# Altium PCB 175-00017_rev1, Two Axis Stepper Driver Apps Board.PcbDoc
Units mm, origin at the board's own origin, x right, y up, seen from the top; angles counter-clockwise.
Board outline 35 x 80 mm, 6 copper layers (Top (*.GTL), GND1 (*.GP1), Mid-Layer 1 (*.G1), +48V (*.GP2), GND2(*.GP3), Bottom Layer (*.GBL)); 21 components, 44 nets, 200 pads, 77 vias.
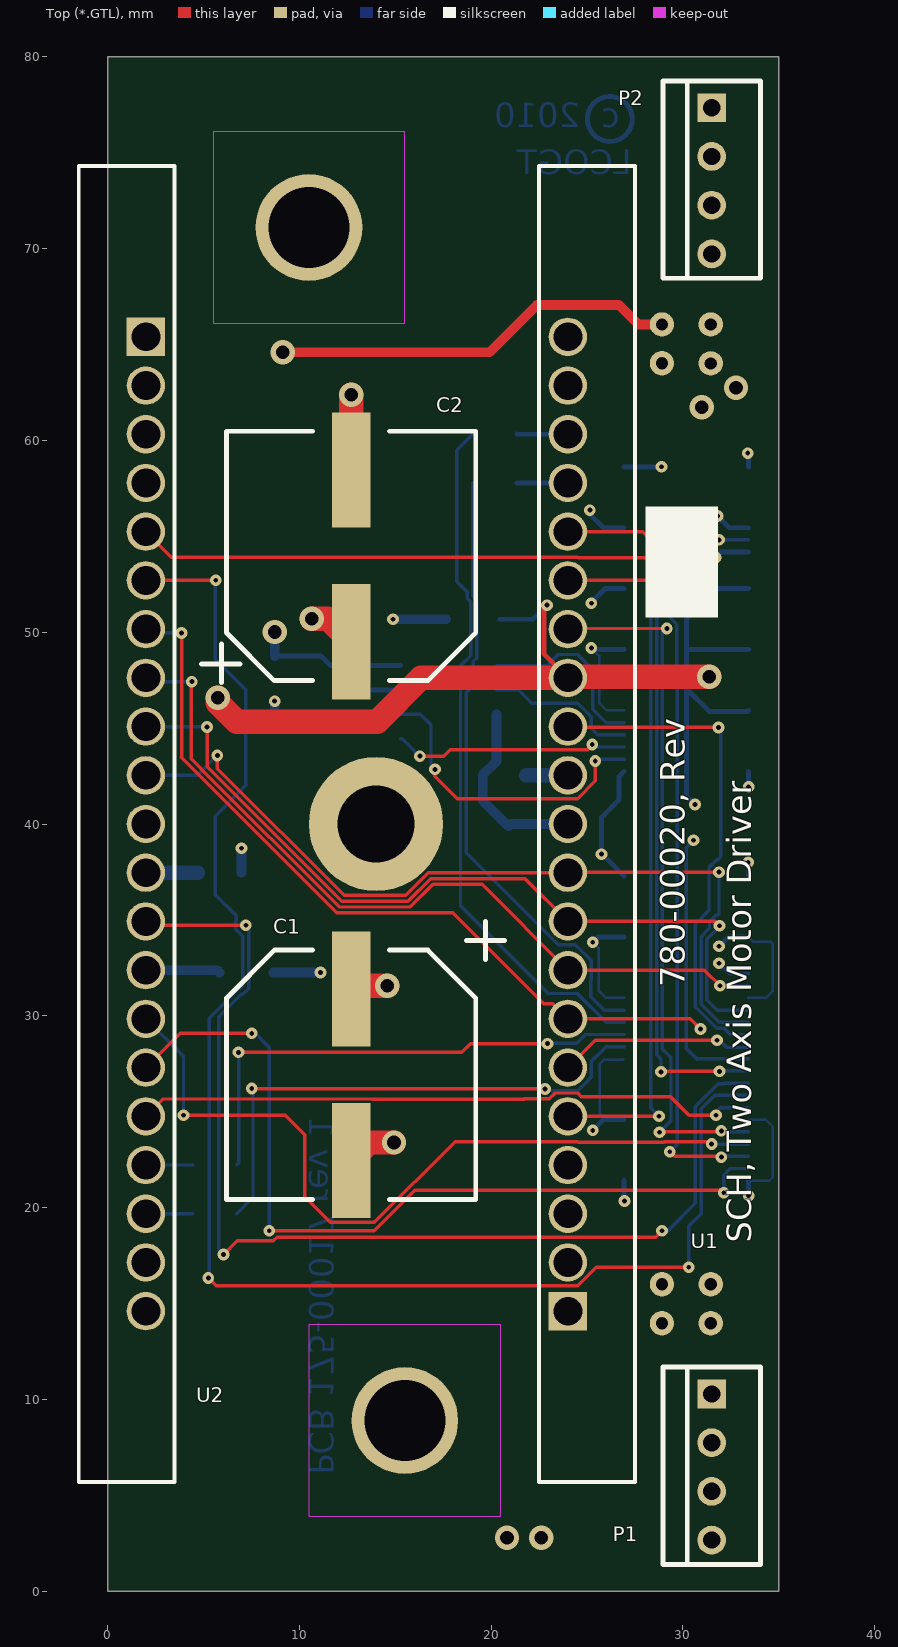
[diagram p0: Top (*.GTL) view]
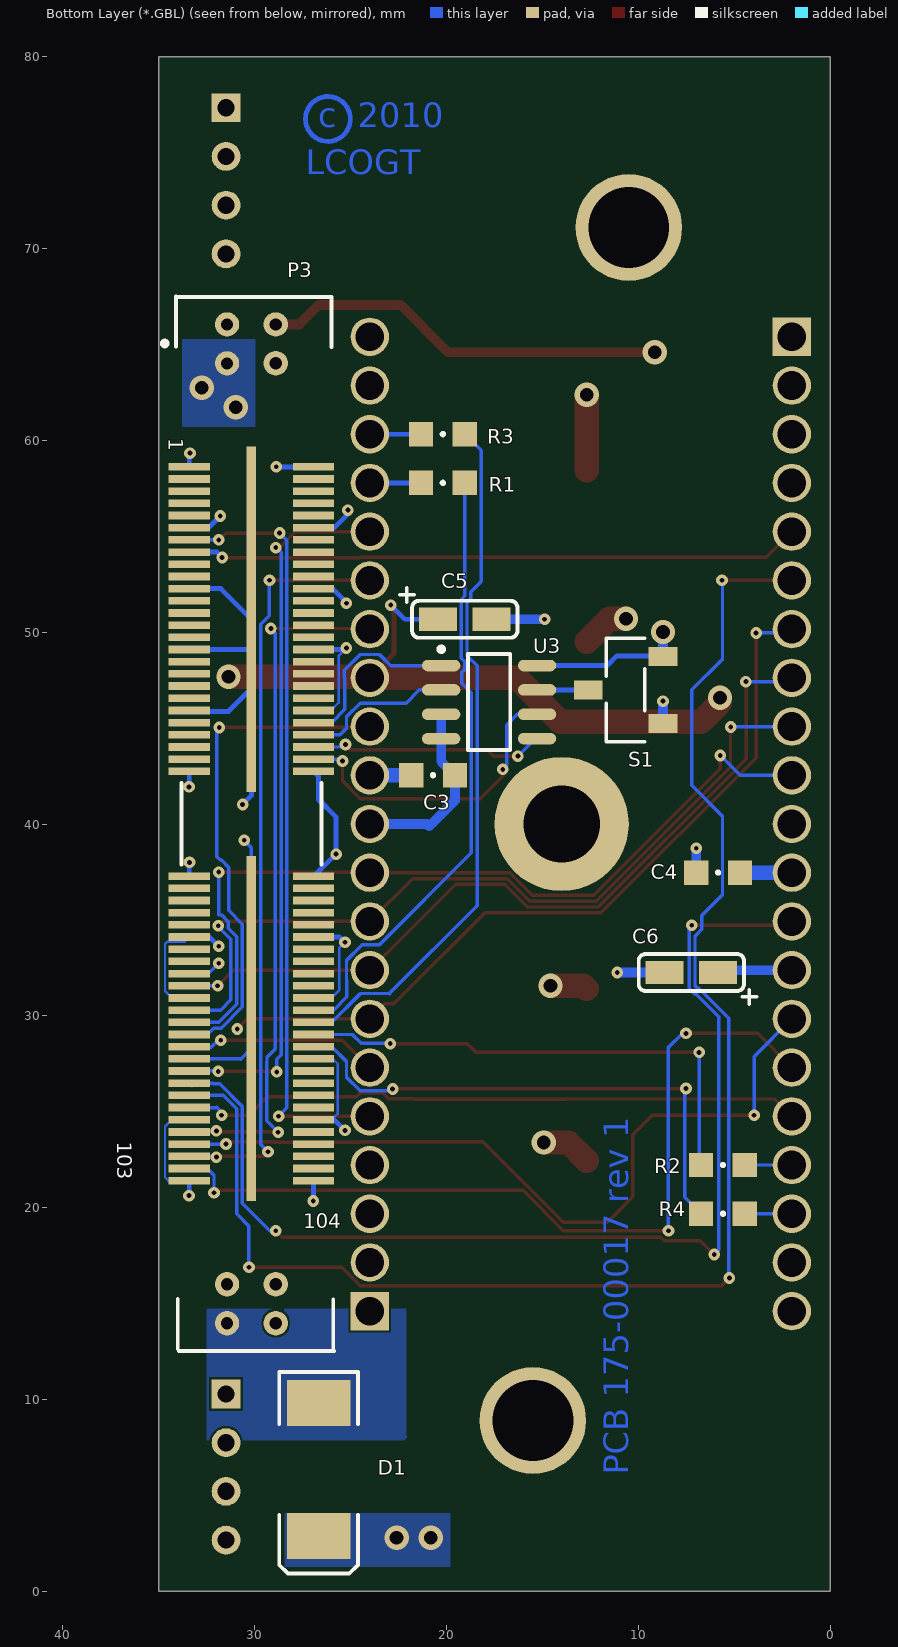
[diagram p1: Bottom Layer (*.GBL) view, seen from below]
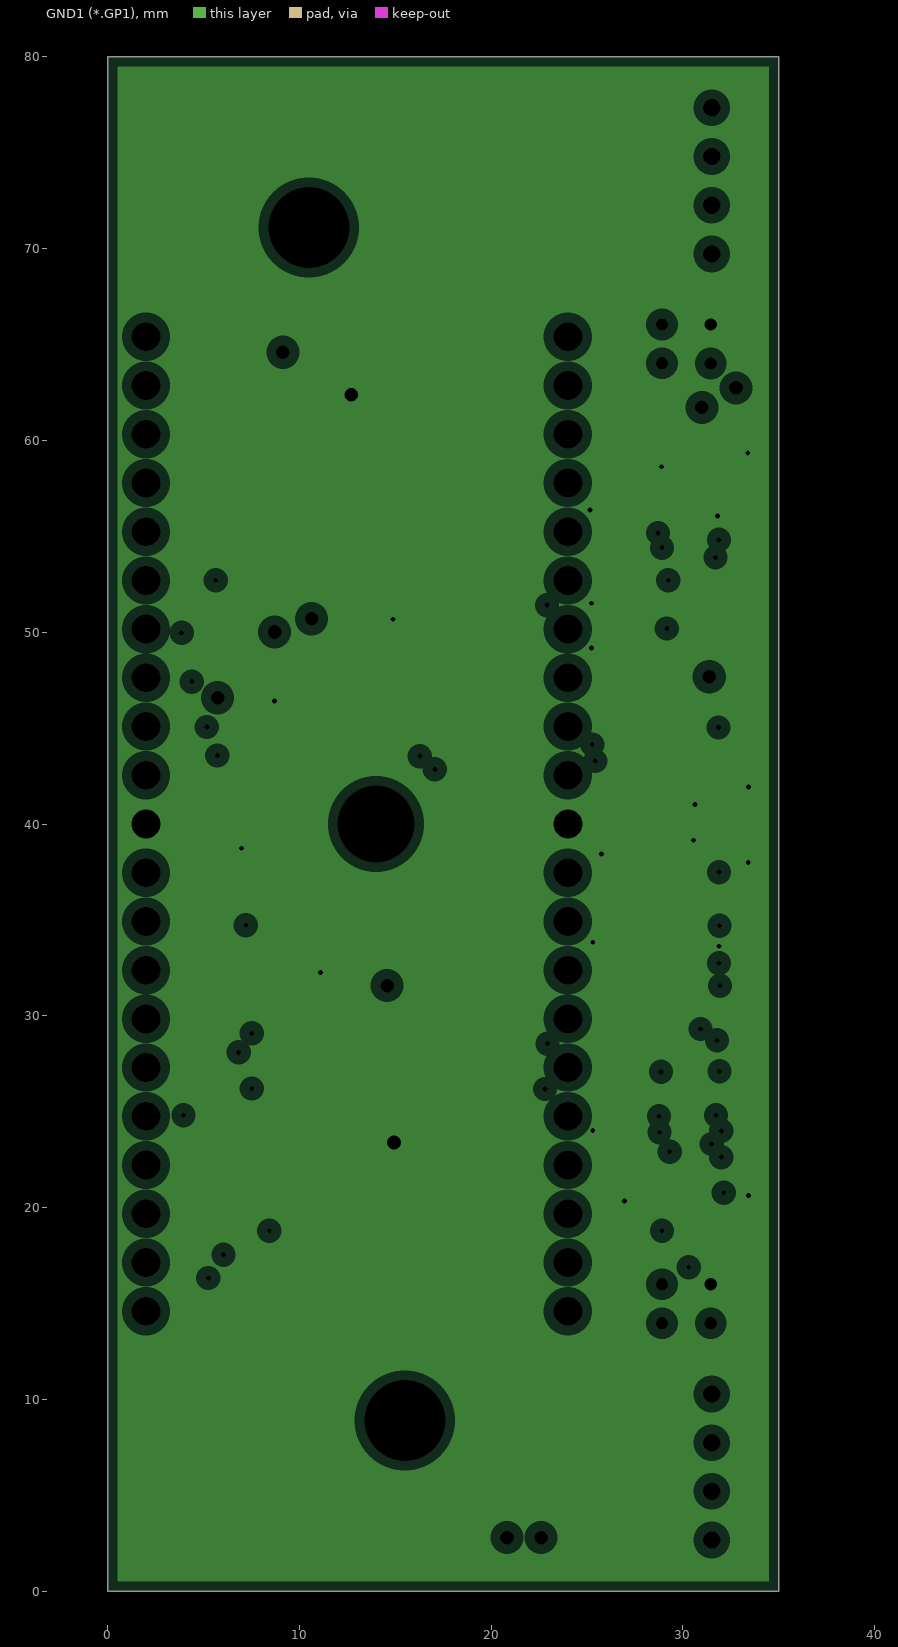
[diagram p2: GND1 (*.GP1), clearances drawn from the general rule]
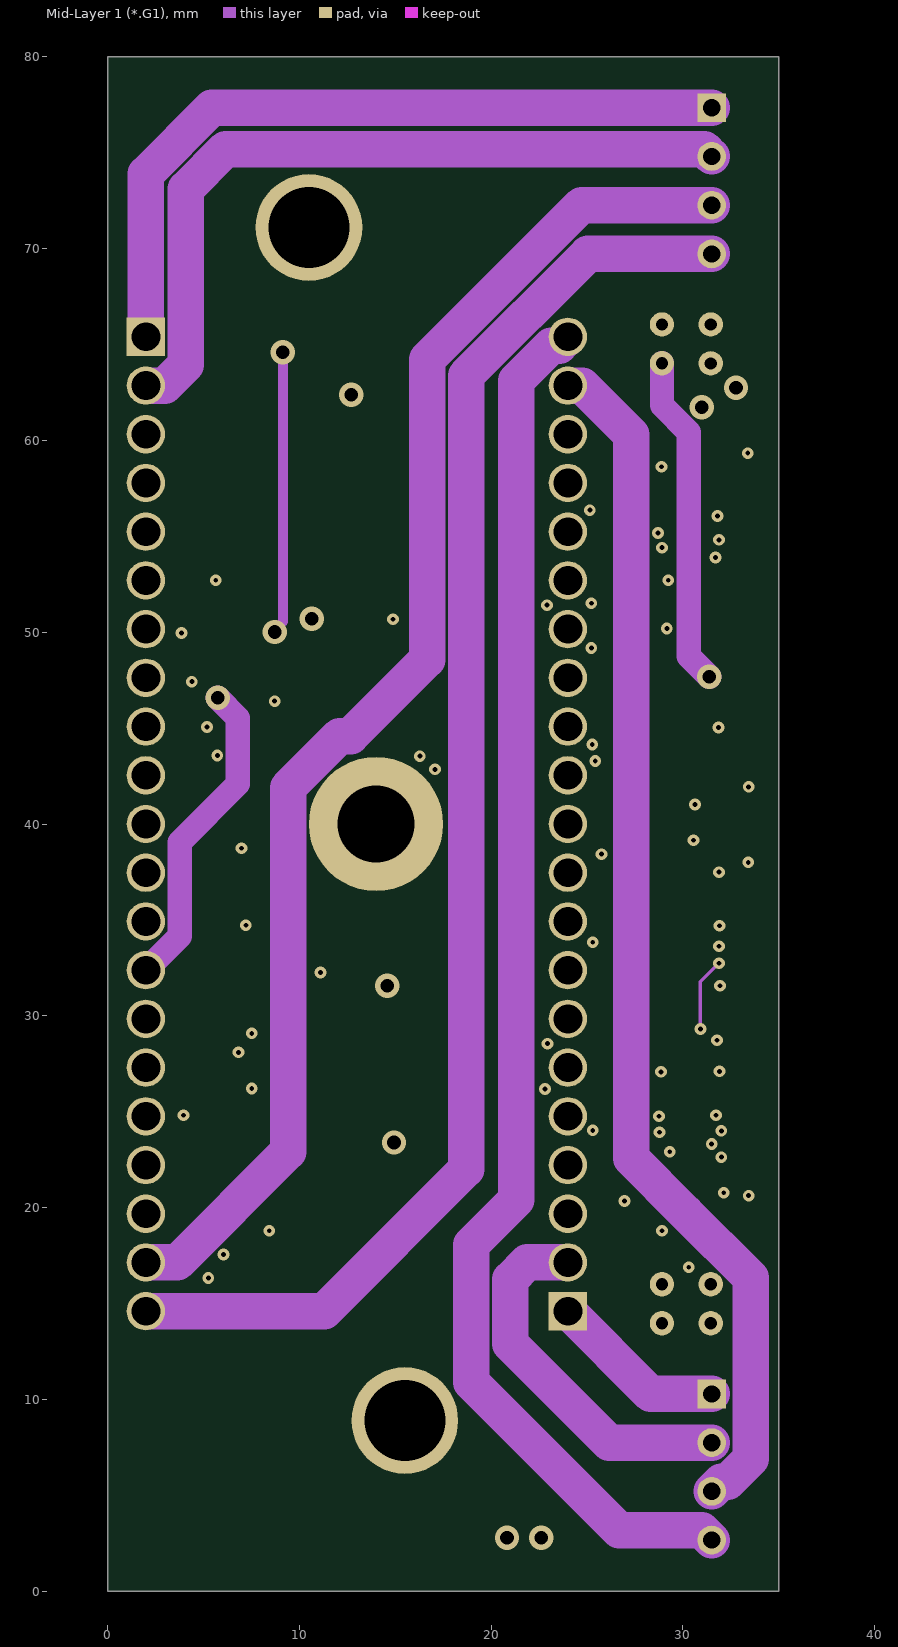
[diagram p3: Mid-Layer 1 (*.G1)]
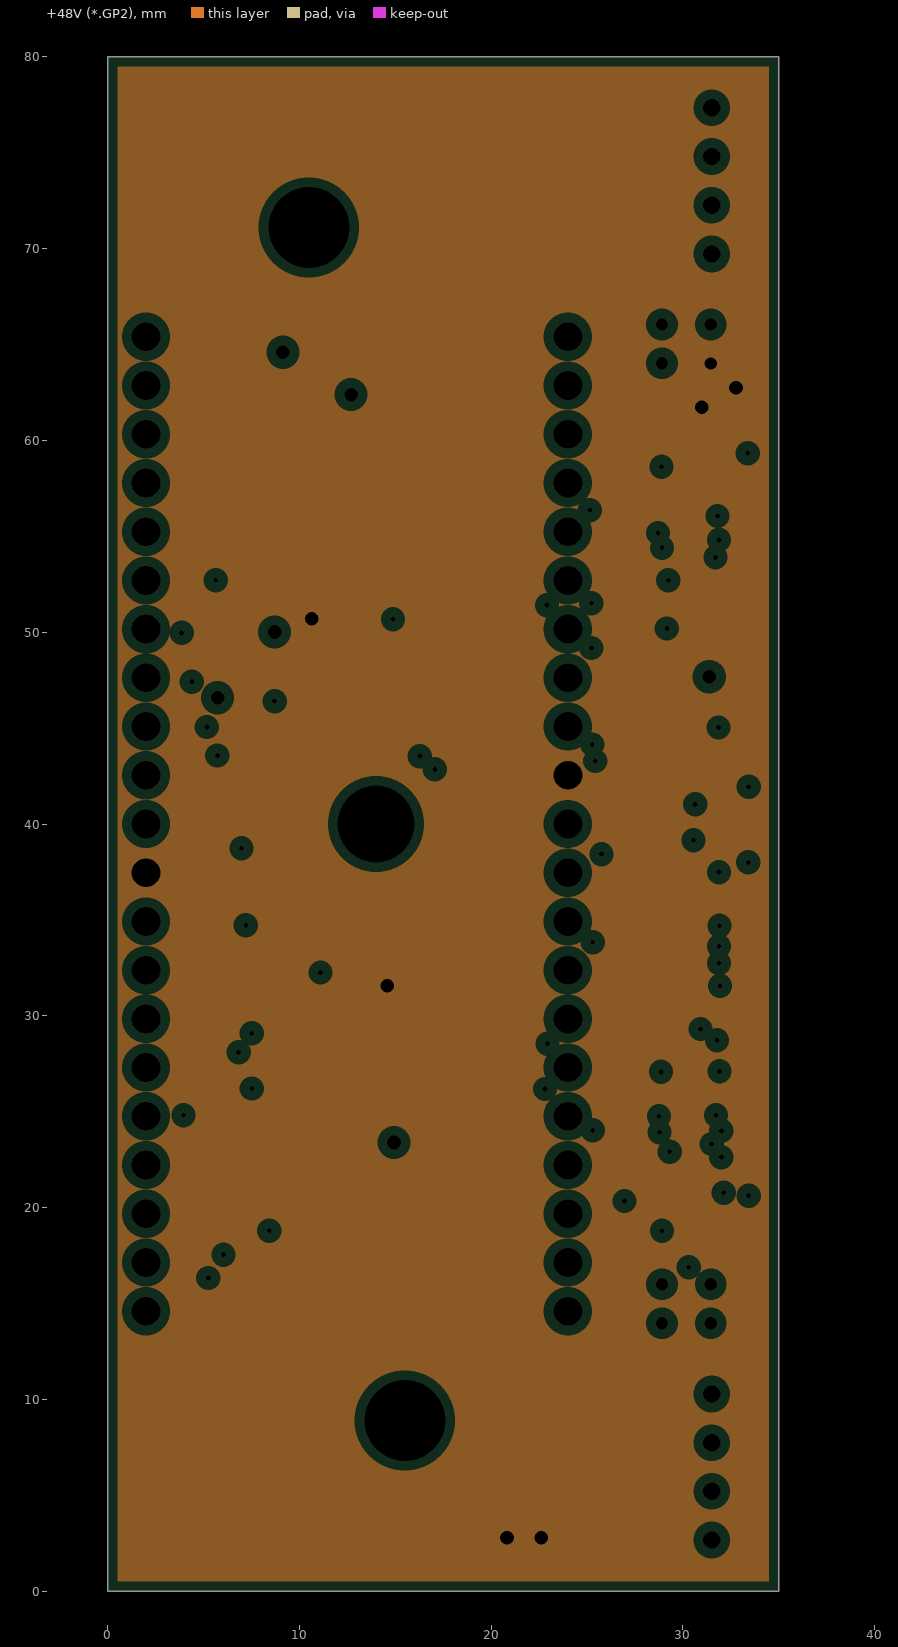
[diagram p4: +48V (*.GP2), clearances drawn from the general rule]
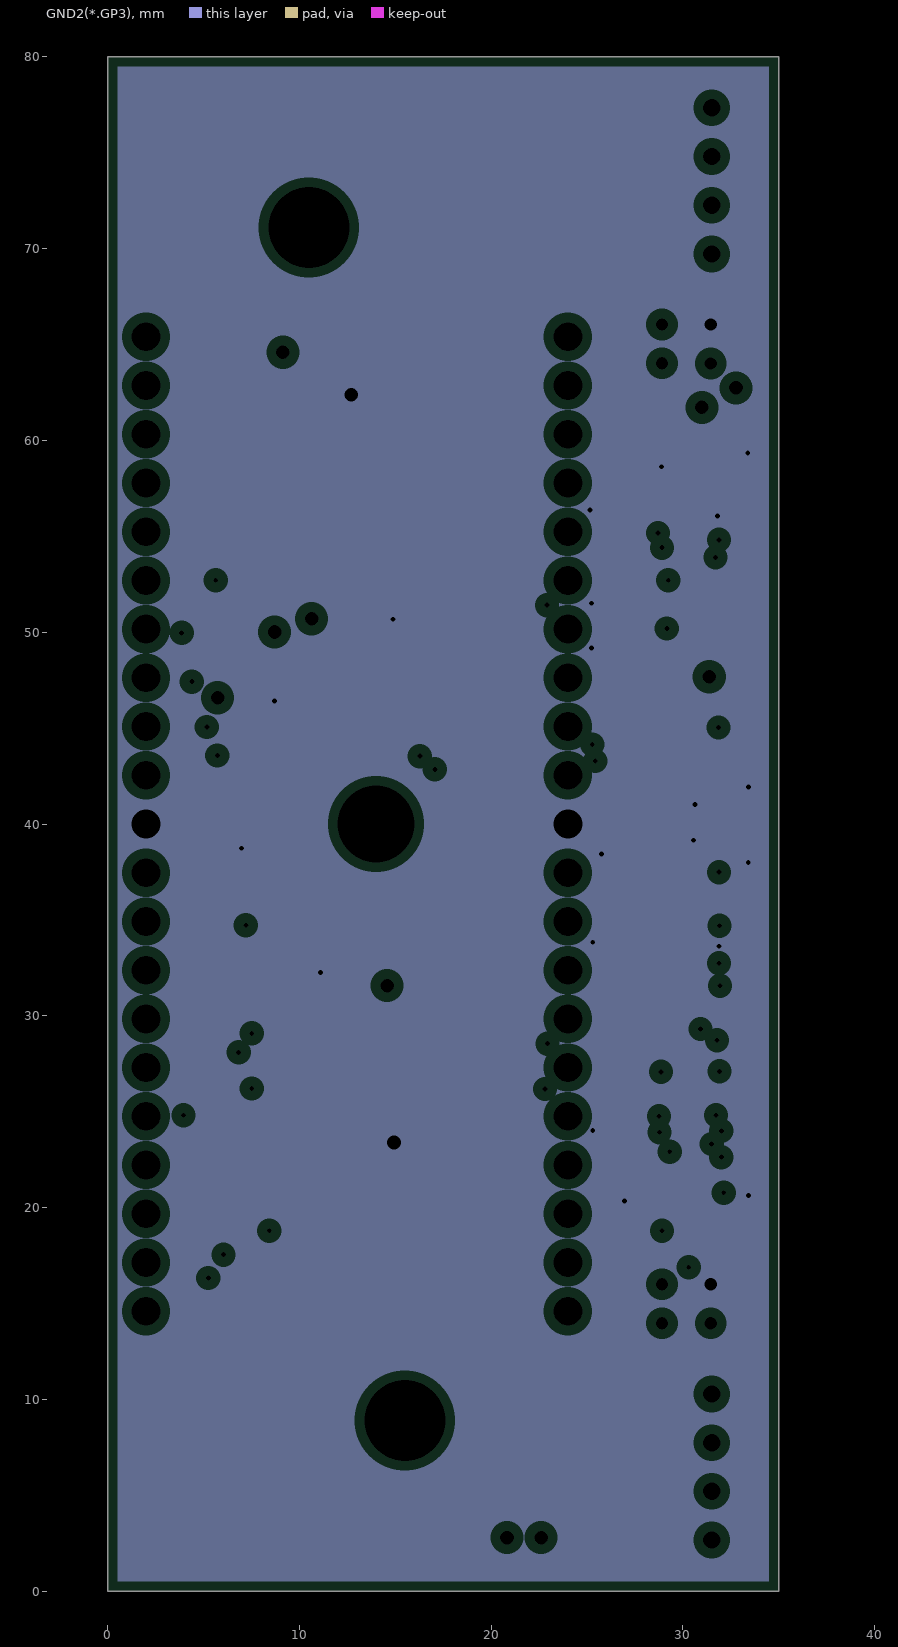
[diagram p5: GND2(*.GP3), clearances drawn from the general rule]

## Layer stack, top to bottom
Top (*.GTL): signal copper 0.0356
Dielectric: core 0.32, FR-4, Dk 4.8
GND1 (*.GP1): plane copper 0.0356, net GND
Dielectric: prepreg 0.32, FR-4, Dk 4.8
Mid-Layer 1 (*.G1): signal copper 0.0711
Dielectric: core 0.32, FR-4, Dk 4.8
+48V (*.GP2): plane copper 0.0711, net +48V
Dielectric: prepreg 0.32, FR-4, Dk 4.8
GND2(*.GP3): plane copper 0.0356, net GND
Dielectric: core 0.32, FR-4, Dk 4.8
Bottom Layer (*.GBL): signal copper 0.0356

## Board outline
0,0 0,80 35,80 35,0

## Design rules (kind name [scope] priority, off if disabled: settings)
Clearance [All] p1: gap=0.127
ComponentClearance [All] p1: gap=-100 collisioncheckmode=3 verticalgap=-20 showdistances=FALSE
HoleSize [All] p1: absolutevalues=TRUE maxlimit=6.35 minlimit=0.025 maxpercent=80.000 minpercent=20.000
MinimumSolderMaskSliver [All] p1: minsoldermaskwidth=0.025
PlaneClearance [All] p1: clearance=0.508
PlaneConnect [All] p1: planeconnectstyle=Relief reliefexpansion=0.508 reliefentries=4 reliefconductorwidth=0.254 reliefairgap=0.254
PolygonConnect [All] p1: connectstyle=Direct reliefconductorwidth=0.254 reliefentries=4 polygonreliefangle="90 Angle"
RoomDefinition "780-00020, rev 1, pg1, Two Axis Stepper Driver" [InComponentClass('780-00020, rev 1, pg1, Two Axis Stepper Driver')] p1: confinementstyle=ConfineIn formatcopy=TRUE lockcomponents=FALSE outline -12.573,-7.01 45.339,-7.01 45.339,87.3 -12.573,87.3
RoutingVias [All] p1: holewidth=0.711 width=1.27 viastyle="Through Hole" minholewidth=0.254 minwidth=0.61 maxholewidth=0.711 maxwidth=1.27
SilkToSilkClearance [All] p1: silktosilkclearance=0.025
SilkscreenOverComponentPads [All] p1: minsilkscreentomaskgap=0.025
SolderMaskExpansion [All] p1: expansion=0.102
Width [All] p1: maxlimit=2.54 minlimit=0.127 preferedwidth=0.254
21 further rules are at their usual default settings.

## Classes and differential pairs
component class "780-00020, rev 1, pg1, Two Axis Stepper Driver": C1 C2 C3 C4 C5 C6 D1 P1 P2 P3 R1 R2 R3 R4 S1 U1 U2 U3

## Components (designator, comment, footprint, x,y, rotation, side; value= is the part's Value field where it differs from the comment)
C1 "63V" "CAP 220uF 63V" 12.7,26.924 r0 top
C2 "63V" "CAP 220uF 63V" 12.7,53.975 r180 top
C3 "100V" SMD_0805 20.701,42.545 r0 bottom
C4 "100V" SMD_0805 5.842,37.465 r180 bottom
C5 "10V" SMD_CAP_3216 19.05,50.673 r0 bottom
C6 "10V" SMD_CAP_3216 7.239,32.258 r180 bottom
D1 "S5BC-13-F" SMC 26.67,6.35 r270 bottom
P1 "Header 4" "HDR1X4 for IDC" 31.496,10.287 r270 top
P2 "Header 4" "HDR1X4 for IDC" 31.496,77.343 r270 top
P3 "QMSS-052-06.75-L-D-PC4" "QMS SMD PWR PINS - 104PIN" 30.175,40.009 r270 bottom
R1 "Res 0805" SMD_0805 20.193,57.785 r180 bottom
R2 "Res 0805" SMD_0805 5.588,22.225 r0 bottom
R3 "Res 0805" SMD_0805 20.193,60.325 r180 bottom
R4 "Res 0805" SMD_0805 5.588,19.685 r0 bottom
S1 "CJS-1200TB" CAS-120B 10.668,46.99 r90 bottom
U1 "IM481H Plus" "IM481H VERTICAL" 24,40 r90 top
U2 "IM481H Plus" "IM481H VERTICAL" 2,40 r270 top
U3 "M24C32RMN1" SOP8_N 17.78,46.355 r180 bottom
? "Comment" "TARGET MECHANICAL 5" -27.762,-15.9 r0 top
? "Comment" "TARGET MECHANICAL 5" -25.248,92.964 r0 top
? "Comment" "TARGET MECHANICAL 5" 64.313,93.193 r0 top

## Footprints (in the part's own frame and the unit in brackets; to place one, negate y for a bottom-side part, rotate by r counter-clockwise, add the part's x,y. Pads: shape width x height; smd on the part's side, far side on the other; paste and mask are expansions set on the pad)
"CAP 220uF 63V" [mm] "United Chemi-Con size KG5"
  rect 2x6 smd: 1(0,4.475) 2(0,-4.475)
  silkscreen extent -6.5,-6.5 8,8
CAS-120B [mm] "Copal Electronics CAS SMD Slide Switch"
  rect 1x1.5 smd: 1(-1.75,-1.95) 2(0,1.95) 3(1.75,-1.95)
  silkscreen extent -2.69,-1 2.69,1
"HDR1X4 for IDC" [mm] "Connector; Header; 4 Position"
  rect 1.5x1.5 hole 0.9: 1(0,0)
  round 1.5 hole 0.9: 2(2.54,0) 3(5.08,0) 4(7.62,0)
  silkscreen extent -1.4,-2.54 8.89,2.54
"IM481H VERTICAL" [mm] "Stepper motor driver"
  rect 2x2 hole 1.5: 1(-25.4,0)
  round 2 hole 1.5: 2(-22.86,0) 3(-20.32,0) 4(-17.78,0) 5(-15.24,0) 6(-12.7,0) 7(-10.16,0) 8(-7.62,0) 9(-5.08,0) 10(-2.54,0) 11(0,0) 12(2.54,0) 13(5.08,0) 14(7.62,0) 15(10.16,0) 16(12.7,0) 17(15.24,0) 18(17.78,0) 19(20.32,0) 20(22.86,0) 21(25.4,0)
  silkscreen extent -34.3,-3.5 34.3,1.5
"QMS SMD PWR PINS - 104PIN" [mm] "52pos (104 pin) + 8 pwr pins"
  rect 0.4x2.15 smd mask+0: 1(-18.612,-3.24) 2(-18.612,3.24) 3(-17.977,-3.24) 4(-17.977,3.24) 5(-17.342,-3.24) 6(-17.342,3.24) 7(-16.707,-3.24) 8(-16.707,3.24) 9(-16.072,-3.24) 10(-16.072,3.24) 11(-15.437,-3.24) 12(-15.437,3.24) 13(-14.802,-3.24) 14(-14.802,3.24) 15(-14.167,-3.24) 16(-14.167,3.24) 17(-13.532,-3.24) 18(-13.532,3.24) 19(-12.897,-3.24) 20(-12.897,3.24) 21(-12.262,-3.24) 22(-12.262,3.24) 23(-11.627,-3.24) 24(-11.627,3.24) 25(-10.992,-3.24) 26(-10.992,3.24) 27(-10.357,-3.24) 28(-10.357,3.24) 29(-9.722,-3.24) 30(-9.722,3.24) 31(-9.087,-3.24) 32(-9.087,3.24) 33(-8.452,-3.24) 34(-8.452,3.24) 35(-7.817,-3.24) 36(-7.817,3.24) 37(-7.182,-3.24) 38(-7.182,3.24) 39(-6.547,-3.24) 40(-6.547,3.24) 41(-5.912,-3.24) 42(-5.912,3.24) 43(-5.277,-3.24) 44(-5.277,3.24) 45(-4.642,-3.24) 46(-4.642,3.24) 47(-4.007,-3.24) 48(-4.007,3.24) 49(-3.372,-3.24) 50(-3.372,3.24) 51(-2.737,-3.24) 52(-2.737,3.24) 53(2.728,-3.24) 54(2.728,3.24) 55(3.363,-3.24) 56(3.363,3.24) 57(3.998,-3.24) 58(3.998,3.24) 59(4.633,-3.24) 60(4.633,3.24) 61(5.268,-3.24) 62(5.268,3.24) 63(5.903,-3.24) 64(5.903,3.24) 65(6.538,-3.24) 66(6.538,3.24) 67(7.173,-3.24) 68(7.173,3.24) 69(7.808,-3.24) 70(7.808,3.24) 71(8.443,-3.24) 72(8.443,3.24) 73(9.078,-3.24) 74(9.078,3.24) 75(9.713,-3.24) 76(9.713,3.24) 77(10.348,-3.24) 78(10.348,3.24) 79(10.983,-3.24) 80(10.983,3.24) 81(11.618,-3.24) 82(11.618,3.24) 83(12.253,-3.24) 84(12.253,3.24) 85(12.888,-3.24) 86(12.888,3.24) 87(13.523,-3.24) 88(13.523,3.24) 89(14.158,-3.24) 90(14.158,3.24) 91(14.793,-3.24) 92(14.793,3.24) 93(15.428,-3.24) 94(15.428,3.24) 95(16.063,-3.24) 96(16.063,3.24) 97(16.698,-3.24) 98(16.698,3.24) 99(17.333,-3.24) 100(17.333,3.24) 101(17.968,-3.24) 102(17.968,3.24) 103(18.603,-3.24) 104(18.603,3.24)
  rect 18x0.5 smd mask+0: 105(-10.672,0) 106(10.668,0)
  round 1.27 hole 0.635 mask+0: PC01(-26.035,-1.27) PC02(-26.035,1.27) PC03(-24.003,-1.27) PC04(-24.016,1.27) PC05(24.003,-1.27) PC06(24.003,1.27) PC07(26.035,-1.27) PC08(26.035,1.27)
  silkscreen extent -27.49,-4.65 27.48,4.32
SMC [mm] "DO-214-AB/SMC; 2 C-Bend Leads; Body 7.9 x 5.9 mm, inc. leads (LxW)"
  rect 2.4x3.3 smd: 1(-3.475,0) 2(3.475,0)
  silkscreen extent -5.07,-2.05 5.43,2.05
SMD_0805 [mil]
  rect 50x50 smd: 1(-45,0) 2(45,0)
  silkscreen extent -1,-1 1,1
SMD_CAP_3216 [mil]
  rect 78x48 smd: 1(55,0) 2(-55,0)
  silkscreen extent -108,-65 134,38
SOP8_N [mm] "SOIC, 8-Leads, Body 4.9x3.9mm, Pitch 1.27mm, IPC Medium Density"
  oval 2x0.6 smd: 1(-2.5,1.905) 2(-2.5,0.635) 3(-2.5,-0.635) 4(-2.5,-1.905) 5(2.5,-1.905) 6(2.5,-0.635) 7(2.5,0.635) 8(2.5,1.905)
  silkscreen extent -2.63,-2.5 1.1,2.88, body extent -2,-2.5 2,2.5, height 1.75
"TARGET MECHANICAL 5" [mm]

## Part data
C1 C2: library part "Cap 220uF, 63V", "CAP 220UF 63V ELECT MVH SMD"
C3 C4: library part "Cap SMD", "Capacitor"
C5 C6: library part "Cap Tant 16V", "outline 3.2mm x 1.6mm"
D1: library part Diode, "Default Diode"
P1 P2: "Header, 4-Pin"
P3: library part "QMSS-PC4-104 pin", "SAMTEC QMSS W/PWR PINS"
R1 R2 R3 R4: library part "Res SMD", "Resistor 0805"
S1: library part SW_SPDT_DOUG
U1 U2: "Hybrid stepper motor driver"
U3: "32 Kbit Serial I²C Bus EEPROM"

## Free pads (board coordinates)
  round 5.56 hole 4.22: 0(10.5,71.1) 0(15.5,8.9)
  round 7 hole 4: 0(14,40)

## Via types
v1: diameter 0.61, hole 0.254, Top (*.GTL) to Bottom Layer (*.GBL), 65 vias
v2: diameter 1.27, hole 0.711, Top (*.GTL) to Bottom Layer (*.GBL), 12 vias

## Nets (pads, with @x,y where several pads share a name; then routed paths per layer and width w, separated by ;. In a path a pad name is that pad's centre, name@x,y a point inside that pad or via, vN(x,y) a via of type N, cw(c..) or ccw(c..) an arc to the next point about the centre after c; other vN are vias at no path point)
+3.3V: P3.PC02 S1.3 U3.8 | length 44
  Top (*.GTL) w0.508: v2(9.144,64.592) 19.918,64.592 22.382,67.056 26.67,67.056 27.682,66.044 P3.PC02
  Mid-Layer 1 (*.G1) w0.508: v2(8.712,50.013) 8.712,50.114 9.144,50.546 v2(9.144,64.592)
  Bottom Layer (*.GBL) w0.254: S1.3 8.746,48.768 11.125,48.768 11.633,48.26 U3.8
  Bottom Layer (*.GBL) w0.508: v2(8.712,50.013) 8.712,48.746 S1.3
+5V: C5.1 C6.1 P3.PC04 U1.14 U2.14 | length 72.3
  Top (*.GTL) w0.254: v1(22.911,51.41) 22.746,51.245 22.746,48.874 U1.14
  Top (*.GTL) w1.27: v2(5.74,46.584) 5.74,46.33 6.731,45.339 14.063,45.339 16.344,47.62 U1.14 24.056,47.676 v2(31.369,47.676)
  Mid-Layer 1 (*.G1) w1.27: U2.14 3.762,34.142 3.762,39.05 6.794,42.083 6.794,45.529 v2(5.74,46.584) ; P3.PC04 28.905,61.829 30.302,60.432 30.302,48.743 v2(31.369,47.676)
  Bottom Layer (*.GBL) w0.254: C5.1 22.174,50.673 v1(22.911,51.41)
  Bottom Layer (*.GBL) w0.508: U2.14 5.72,32.38 C6.1
+12V: P3.PC06
+24V: D1.1 P3.PC07
+48V: C1.1 C2.1 C3.2 C4.2 D1.2 P3.PC03 U1.12 U2.12 | length 9.4
  Top (*.GTL) w1.27: v2(10.643,50.698) 11.502,50.698 C2.1 ; C1.1 12.873,31.572 v2(14.58,31.572)
  Bottom Layer (*.GBL) w0.762: U2.12 2.005,37.465 C4.2 ; C3.2 23.995,42.545 U1.12
  other v2: 20.828,2.794 22.606,2.794 30.988,61.722 32.766,62.738
-12V: P3.PC08
DAC_OUT0: P3.13 U1.5 | length 40.4
  Top (*.GTL) w0.178: U1.5 28.748,24.76 v1(28.753,24.765) ; v1(28.702,55.169) 31.521,55.169 v1(31.877,54.813)
  Bottom Layer (*.GBL) w0.178: v1(28.702,55.169) 28.321,54.788 28.321,25.197 v1(28.753,24.765) ; v1(31.877,54.813) 33.413,54.813 P3.13
DAC_OUT1: P3.15 U2.5 | length 32.1
  Top (*.GTL) w0.178: U2.5 3.324,53.916 24.504,53.916 24.533,53.886 31.686,53.886 v1(31.699,53.899)
  Bottom Layer (*.GBL) w0.254: v1(31.699,53.899) 31.977,54.176 P3.15
DIRECTION1: P3.99 U1.16 | length 39.6
  Top (*.GTL) w0.178: U1.16 29.23,52.7 v1(29.235,52.705) ; v1(29.312,22.911) 29.54,22.682 v1@31.979,22.682
  Bottom Layer (*.GBL) w0.178: v1(29.235,52.705) 29.235,50.851 29.68,50.406 29.68,48.197 29.693,48.184 29.693,24.105 29.693,23.292 v1(29.312,22.911) ; v1@31.979,22.682 31.985,22.676 P3.99
  other v1: 32.003,22.631
DIRECTION2: P3.101 U2.16 | length 44
  Top (*.GTL) w0.178: U2.16 3.783,29.083 v1(7.518,29.083) ; v1(8.433,18.796) 13.91,18.796 16.01,20.896 32.005,20.896 v1(32.124,20.777)
  Bottom Layer (*.GBL) w0.178: v1(7.518,29.083) 7.696,29.083 8.433,28.346 v1(8.433,18.796) ; v1(32.124,20.777) 32.124,21.696 32.47,22.041 P3.101
GND: C1.2 C2.2 C3.1 C4.1 C5.2 C6.2 P3.1 P3.2 P3.11 P3.12 P3.21 P3.22 P3.31 P3.32 P3.41 P3.42 P3.51 P3.52 P3.53 P3.54 P3.63 P3.64 P3.73 P3.74 P3.83 P3.84 P3.93 P3.94 P3.103 P3.104 P3.105 P3.106 P3.PC01 P3.PC05 S1.1 U1.11 U2.11 U3.3 U3.4 | length 113.4
  Top (*.GTL) w1.27: C1.2 13.644,23.393 v2(14.935,23.393) ; C2.2 v2(12.7,62.382)
  Bottom Layer (*.GBL) w0.127: v1@25.221,49.174 25.627,48.768 25.627,46.319 26.026,45.921 P3.42 ; v1@25.323,33.807 25.602,33.528 25.602,31.318 25.989,30.931 P3.74 ; P3.84@26.897,27.737 26.872,27.711 25.881,27.711 25.669,27.499 25.669,24.901 25.989,24.581 P3.94 ; P3.103 34.494,21.406 34.5,21.4 34.681,21.581 34.681,24.225 34.324,24.581 P3.93 ; P3.73 34.324,30.931 34.681,31.287 34.681,33.75 34.569,33.862 33.66,33.862 P3.63
  Bottom Layer (*.GBL) w0.178: v1(30.55,39.15) 30.175,38.775 P3.106 30.175,28.296 30.734,27.737 30.753,27.756 P3.83
  Bottom Layer (*.GBL) w0.254: v1(25.146,56.363) 25.146,56.159 25.859,55.446 P3.12 ; v1(25.222,49.174) 25.3,49.096 P3.32 ; v1(25.222,51.511) 25.273,51.562 25.273,51.608 25.936,52.271 P3.22 ; v1(25.298,24.028) 25.851,24.581 P3.94 ; v1(25.298,33.833) 25.572,34.106 P3.64 ; P3.104 26.935,20.36 v1(26.949,20.345) ; P3.54 25.786,38.43 v1(25.756,38.43) 25.756,40.356 26.675,41.275 26.675,42.486 P3.52 ; P3.2 28.878,58.621 v1(28.88,58.623) ; v1(30.632,41.021) 30.175,41.478 P3.105 ; v1(31.801,56.058) 32.412,55.446 P3.11 ; v1(31.877,33.63) 32.354,34.106 P3.63 ; v1(33.376,59.334) 33.415,59.295 P3.1 ; v1(33.401,37.998) 33.415,37.984 P3.53 ; P3.103 33.415,20.636 v1(33.426,20.625) ; P3.51 33.415,41.947 v1(33.426,41.935) ; P3.41 33.366,45.872 31.369,45.872 30.175,47.066 P3.105@30.175,49.124 ; P3.31 30.202,49.096 P3.105@30.175,49.124 ; P3.21 31.765,52.271 P3.105 ; P3.105@30.175,49.124 P3.105
  Bottom Layer (*.GBL) w0.508: C4.1 v1(6.985,38.735) ; C6.2 11.074,32.258 11.1,32.283 v1(11.1,32.258) ; v1(8.712,46.406) 8.718,46.4 S1.1 ; v1(14.884,50.673) C5.2 ; U3.3 U3.4 20.28,43.267 C3.1 19.558,41.224 20.904,39.878 21.026,40 U1.11
GP_OUT_D6: P3.69 U1.7 U2.7 | length 47
  Top (*.GTL) w0.178: v1(3.861,49.962) 3.861,43.51 3.837,43.486 11.953,35.37 17.996,35.37 22.746,30.62 23.22,30.62 U1.7 30.383,29.84 v1(30.912,29.312)
  Mid-Layer 1 (*.G1) w0.178: v1(30.912,29.312) 30.912,31.775 v1(31.877,32.741)
  Bottom Layer (*.GBL) w0.178: U2.7 2.198,49.962 v1(3.861,49.962) ; v1(31.877,32.741) 32.416,32.201 P3.69
GP_OUT_D7: P3.71 U1.8 U2.8 | length 41.4
  Top (*.GTL) w0.178: v1(4.394,47.422) 4.369,47.396 4.369,43.408 4.889,42.888 4.889,42.864 12.079,35.674 15.792,35.674 16.968,36.85 19.53,36.85 U1.8 31.12,32.38 v1(31.934,31.566) v1@32.08,31.566
  Bottom Layer (*.GBL) w0.178: U2.8 2.198,47.422 v1(4.394,47.422) ; v1@32.08,31.566 P3.71
GP_OUT_D8: P3.75 U1.9 U2.9 | length 42.9
  Top (*.GTL) w0.178: v1(5.182,45.06) 5.194,45.047 5.194,42.99 12.205,35.979 15.665,35.979 16.841,37.155 21.765,37.155 U1.9 31.679,34.92 v1(31.902,34.696)
  Bottom Layer (*.GBL) w0.178: U2.9 2.02,45.06 v1(5.182,45.06) ; v1(31.902,34.696) 31.928,34.671 31.251,33.994 31.251,30.827 31.781,30.296 P3.75
GP_OUT_D9: P3.77 U1.10 U2.10 | length 44.5
  Top (*.GTL) w0.178: v1@5.74,43.586 v1(5.728,43.574) 5.728,42.888 12.332,36.284 15.539,36.284 16.715,37.46 U1.10 24.03,37.49 v1(31.877,37.49)
  Bottom Layer (*.GBL) w0.178: U2.10 4.694,42.54 v1(5.728,43.574) ; v1@31.928,37.541 v1(31.877,37.49) 31.877,35.255 31.725,35.255 31.382,34.912 31.382,34.556 30.946,34.12 30.946,30.598 31.883,29.661 P3.77
GP_OUT_D10: P3.79 U1.13 | length 26.5
  Top (*.GTL) w0.178: U1.13 24.046,45.034 v1(31.852,45.034)
  Bottom Layer (*.GBL) w0.178: v1(31.852,45.034) 31.979,45.034 31.979,38.303 31.775,38.1 31.725,38.1 31.356,37.732 31.356,35.496 30.641,34.781 30.641,30.472 31.757,29.356 32.139,29.356 32.47,29.026 P3.79
GP_OUT_D11: P3.81 U1.6 | length 10.2
  Top (*.GTL) w0.178: U1.6 25.427,28.727 v1(31.775,28.727)
  Bottom Layer (*.GBL) w0.178: v1(31.775,28.727) 31.902,28.727 32.283,28.346 33.37,28.346 P3.81
GP_OUT_D12: P3.85 U1.17 | length 37.5
  Top (*.GTL) w0.178: U1.17 27.894,55.24 28.728,54.407 v1(28.905,54.407) ; v1(28.854,27.076) 28.88,27.102 v1(31.902,27.102)
  Bottom Layer (*.GBL) w0.178: v1(28.854,27.076) 28.854,27.737 28.626,27.965 28.626,54.178 28.854,54.407 v1(28.905,54.407) ; v1(31.902,27.102) 31.928,27.127 33.35,27.127 33.426,27.203 33.426,27.133 P3.85
GP_OUT_D13: P3.87 U2.13 | length 57.5
  Top (*.GTL) w0.178: U2.13 2.198,34.722 v1(7.214,34.722) ; v1(6.045,17.551) 6.769,18.275 8.648,18.275 8.837,18.464 28.573,18.464 v1(28.905,18.796)
  Bottom Layer (*.GBL) w0.178: v1(6.045,17.551) 5.806,17.791 5.806,29.961 6.972,31.128 7.048,31.128 7.353,31.433 7.353,34.582 v1(7.214,34.722) ; v1(28.905,18.796) 29.219,18.796 30.641,20.218 30.641,25.273 31.835,26.467 32.156,26.467 32.176,26.486 P3.87 P3.87@33.281,26.352
GP_OUT_D14: P3.89 U2.6 | length 79.6
  Top (*.GTL) w0.178: U2.6 5.634,52.7 v1(5.639,52.705) ; v1(5.258,16.332) 5.666,15.924 24.504,15.924 25.471,16.891 v1(30.302,16.891)
  Bottom Layer (*.GBL) w0.178: v1(5.258,16.332) 5.296,16.37 5.296,29.882 6.846,31.432 6.922,31.432 7.048,31.559 7.048,34.151 6.693,34.506 6.693,34.937 6.706,34.95 6.706,35.23 5.613,36.322 5.613,40.411 7.214,42.012 7.214,46.99 5.613,48.59 5.613,52.68 v1(5.639,52.705) ; v1(30.302,16.891) 30.302,19.041 30.946,19.685 30.946,25.147 31.65,25.851 P3.89
GP_OUT_D15: P3.91 U2.17 | length 33.6
  Top (*.GTL) w0.178: U2.17 2.905,25.665 13.789,25.665 13.8,25.654 21.717,25.654 21.73,25.667 23.025,25.667 23.334,25.976 24.504,25.976 24.699,25.781 29.35,25.781 30.315,24.816 v1(31.725,24.816)
  Bottom Layer (*.GBL) w0.178: v1(31.725,24.816) 31.725,24.968 31.979,25.222 31.985,25.216 P3.91 P3.91@32.47,25.216
I2C_SCL: P3.50 U3.6 | length 16.5
  Top (*.GTL) w0.178: v1@16.866,42.824 16.84,42.824 17.068,42.597 17.068,42.495 18.239,41.324 24.504,41.324 25.425,42.246 v1(25.425,43.282)
  Bottom Layer (*.GBL) w0.178: U3.6 16.307,45.72 16.866,45.161 16.866,43.052 v1(17.068,42.85) ; v1(25.425,43.282) 25.525,43.381 P3.50
I2C_SDA: P3.48 U3.5 | length 12.4
  Top (*.GTL) w0.178: v1(16.281,43.536) 17.539,43.536 17.868,43.864 25.043,43.864 25.273,44.094 25.272,44.096 v1(25.272,44.145)
  Bottom Layer (*.GBL) w0.178: U3.5 15.367,44.45 v1(16.281,43.536) ; v1(25.272,44.145) 25.272,44.096 25.351,44.016 P3.48
NetP1_1: P1.1 U1.1 | length 9.3
  Mid-Layer 1 (*.G1) w1.905: U1.1 28.313,10.287 P1.1
NetP1_2: P1.2 U1.2 | length 19.4
  Mid-Layer 1 (*.G1) w1.905: U1.2 21.879,17.14 21,16.261 21,12.9 26.153,7.747 P1.2
NetP1_3: P1.3 U1.20 | length 63.1
  Mid-Layer 1 (*.G1) w1.905: U1.20 24.74,62.86 27.3,60.3 27.3,22.576 30.145,19.731 33.528,16.348 33.528,6.905 32.338,5.715 32.004,5.715 P1.3
NetP1_4: P1.4 U1.21 | length 72.8
  Mid-Layer 1 (*.G1) w1.905: U1.21 23.54,64.939 23.139,64.939 21.3,63.101 21.3,20.4 18.968,18.068 18.968,10.89 26.683,3.175 30.988,3.175 P1.4
NetP2_1: P2.1 U2.1 | length 39.4
  Mid-Layer 1 (*.G1) w1.905: U2.1 2,73.9 5.443,77.343 P2.1
NetP2_2: P2.2 U2.2 | length 40.1
  Mid-Layer 1 (*.G1) w1.905: U2.2 2.987,62.86 4.08,63.953 4.08,73.106 6.156,75.182 31.117,75.182 P2.2
NetP2_3: P2.3 U2.20 | length 72.6
  Mid-Layer 1 (*.G1) w1.905: U2.20 3.64,17.14 9.42,22.921 9.42,41.897 12.103,44.579 12.679,44.579 16.668,48.568 16.668,64.216 24.715,72.263 P2.3
NetP2_4: P2.4 U2.21 | length 76.6
  Mid-Layer 1 (*.G1) w1.905: U2.21 11.3,14.6 18.7,22 18.7,63.375 25.048,69.723 P2.4
NetR1_1: R1.1 U1.18 | length 2.7
  Bottom Layer (*.GBL) w0.254: R1.1 21.341,57.78 U1.18
NetR2_1: R2.1 U2.18 | length 2.4
  Bottom Layer (*.GBL) w0.178: U2.18 4.44,22.22 R2.1
NetR3_1: R3.1 U1.19 | length 2.7
  Bottom Layer (*.GBL) w0.254: R3.1 21.341,60.32 U1.19
NetR4_1: R4.1 U2.19 | length 2.4
  Bottom Layer (*.GBL) w0.178: U2.19 4.44,19.68 R4.1
NetS1_2: S1.2 U3.7 | length 2.7
  Bottom Layer (*.GBL) w0.254: S1.2 U3.7
OPTO_INPUT_8: P3.76 R1.2 | length 32.5
  Bottom Layer (*.GBL) w0.178: R1.2 19.05,51.892 19.241,51.702 19.241,48.65 19.064,48.474 19.064,48.043 19.202,47.904 19.202,47.342 18.707,46.847 18.707,38.493 23.496,33.704 24.395,33.704 25.216,32.884 25.216,31.876 25.196,31.856 25.196,30.989 25.889,30.296 P3.76
OPTO_INPUT_9: P3.78 R3.2 | length 36.5
  Bottom Layer (*.GBL) w0.178: R3.2 18.199,59.474 18.199,52.642 18.745,52.095 18.745,51.766 18.936,51.575 18.936,48.776 18.402,48.243 18.402,35.747 22.985,31.164 ; 22.962,31.14 22.985,31.164 ; P3.78 25.99,29.661 24.487,31.164 22.985,31.164
OPTO_INPUT_10: P3.80 R2.2 | length 26.4
  Top (*.GTL) w0.178: v1(6.833,28.092) 18.466,28.092 18.923,28.55 v1(22.936,28.55)
  Bottom Layer (*.GBL) w0.178: R2.2 6.833,22.327 v1(6.833,28.092) ; v1(22.936,28.55) 22.962,28.575 24.455,28.575 24.906,29.026 P3.80
OPTO_INPUT_11: P3.82 R4.2 | length 27.8
  Top (*.GTL) w0.178: v1(7.518,26.213) 7.544,26.187 v1(22.809,26.187) v1@22.911,26.086
  Bottom Layer (*.GBL) w0.178: R4.2 7.582,20.536 7.582,26.149 v1(7.518,26.213) ; v1@22.911,26.086 22.913,26.084 24.504,26.084 25.216,26.796 25.216,27.617 25.99,28.391 P3.82
SLOT_ID0: P3.44 U3.1 | length 9.6
  Bottom Layer (*.GBL) w0.178: U3.1 22.92,48.26 23.496,48.836 24.504,48.836 25.324,48.016 25.324,47.65 25.298,47.625 25.298,45.977 25.99,45.286 P3.44
SLOT_ID1: P3.46 U3.2 | length 8
  Bottom Layer (*.GBL) w0.178: U3.2 21.412,46.99 22.106,46.296 22.706,46.296 23.904,46.296 24.504,46.296 25.216,45.584 25.216,44.99 25.554,44.651 P3.46
STEP1: P3.95 U1.15 | length 37.6
  Top (*.GTL) w0.178: U1.15 24.03,50.19 v1(29.159,50.19) ; v1(28.778,23.927) 28.804,23.952 v1@32.029,23.952
  Bottom Layer (*.GBL) w0.178: v1(28.778,23.927) 29.375,24.524 29.375,27.597 29.362,27.61 29.362,27.838 28.931,28.27 28.931,49.962 v1(29.159,50.19) ; v1@32.029,23.952 32.035,23.946 P3.95 P3.95@32.47,23.946
  other v1: 32.003,24.003
STEP2: P3.97 U2.15 | length 42.3
  Top (*.GTL) w0.178: v1(3.962,24.816) 9.268,24.816 10.287,23.797 10.287,20.557 11.611,19.233 13.916,19.233 18.119,23.436 24.504,23.436 24.533,23.406 28.994,23.406 29.019,23.431 31.382,23.431 v1(31.496,23.317)
  Bottom Layer (*.GBL) w0.178: U2.15 3.962,27.878 v1(3.962,24.816) ; v1(31.496,23.317) 31.502,23.311 P3.97 P3.97@32.405,23.311
pads on no net: P3.3 P3.4 P3.5 P3.6 P3.7 P3.8 P3.9 P3.10 P3.14 P3.16 P3.17 P3.18 P3.19 P3.20 P3.23 P3.24 P3.25 P3.26 P3.27 P3.28 P3.29 P3.30 P3.33 P3.34 P3.35 P3.36 P3.37 P3.38 P3.39 P3.40 P3.43 P3.45 P3.47 P3.49 P3.55 P3.56 P3.57 P3.58 P3.59 P3.60 P3.61 P3.62 P3.65 P3.66 P3.67 P3.68 P3.70 P3.72 P3.86 P3.88 P3.90 P3.92 P3.96 P3.98 P3.100 P3.102 U1.3 U1.4 U2.3 U2.4
copper on no net: | length 7.4
  Bottom Layer (*.GBL) w0.254: 27.357,76.759 ccw(c26.186,76.759) 27.357,76.759

## Polygon pours and split planes (outlines as drawn)
+24V on Bottom Layer (*.GBL) "Bottom Layer-AGND" (solid, pour order 1000): 32.512,14.732 22.098,14.732 22.098,8.107 22.034,8.043 22.203,7.874 32.512,7.874 32.512,14.732
+48V on Bottom Layer (*.GBL) "Bottom Layer-AGND" (solid, pour order 1001): 28.448,4.064 19.812,4.064 19.812,1.27 28.448,1.27 28.448,4.064
+48V on Bottom Layer (*.GBL) "Bottom Layer-AGND" (solid, pour order 1002): 33.02,65.278 29.972,65.278 29.972,60.706 33.782,60.706 33.782,65.278 33.02,65.278
GND on GND1 (*.GP1) (split plane): 34.49,0.51 0.51,0.51 0.51,79.49 34.49,79.49
+48V on +48V (*.GP2) (split plane): 34.49,0.51 0.51,0.51 0.51,79.49 34.49,79.49
GND on GND2(*.GP3) (split plane): 34.49,0.51 0.51,0.51 0.51,79.49 34.49,79.49

## Keep-outs
Top (*.GTL):
  region: 20.5,13.9 10.5,13.9 10.5,3.9 20.5,3.9 20.5,8.9
  region: 15.5,76.1 5.5,76.1 5.5,66.1 15.5,66.1 15.5,71.1

## Other copper
Top (*.GTL):
  text "*.GTL - TOP LAYER GERBER DATA" at -8.661,-37.821 h2.03
Mid-Layer 1 (*.G1):
  text "*.G1 - MID LAYER 1 GERBER DATA" at -8.661,-37.821 h2.03
Bottom Layer (*.GBL):
  text "c  2010" at 26.694,76.327 h1.27
  text "LCOGT" at 27.329,73.863 h1.27
  text "PCB 175-00017 rev 1" at 10.514,6.071 h1.27 r270
  text "*.GBL - BOTTOM LAYER GERBER DATA" at -8.661,-37.821 h2.03
GND1 (*.GP1) (plane layer: these items are gaps in the copper):
  text "*.GP1 - INTERNAL PLANE LAYER 1 GERBER DATA" at -8.661,-37.821 h2.03
+48V (*.GP2) (plane layer: these items are gaps in the copper):
  text "*.GP2 - INTERNAL PLANE LAYER 2 GERBER DATA" at -8.661,-37.821 h2.03
GND2(*.GP3) (plane layer: these items are gaps in the copper):
  text "*.GP3- INTERNAL PLANE LAYER 3 GERBER DATA" at -8.661,-37.821 h2.03

## Silkscreen, mask and mechanical layers (free items; w line width, h text height)
Top Overlay:
  rectangle: 28.04,50.775 31.825,56.54
  text "780-00020, Rev" at 30.098,31.496 h1.27 r90
  text "SCH, Two Axis Motor Driver" at 33.552,18.161 h1.27 r90
  text "*.GTO - TOP OVERLAY GERBER DATA" at -8.661,-37.821 h2.03
Bottom Overlay:
  text "*GBO - BOTTOM OVERLAY GERBER DATA" at -8.661,-37.821 h2.03
Top Paste:
  text "*.GTP - TOP-SIDE SOLDER PASTE MASK" at -8.662,-37.82 h2.03
Bottom Paste:
  text "*.GBP - BOTTOM-SIDE SOLDER PASTE MASK" at -8.662,-37.82 h2.03
Top Solder:
  text "*.GTS - TOP SOLDER MASK GERBER DATA" at -8.661,-37.821 h2.03
Bottom Solder:
  text "*.GBS - BOTTOM SOLDER MASK GERBER DATA" at -8.661,-37.821 h2.03
Mechanical 1:
  the board outline again, w0.762
Mechanical 2:
  lines w0.254: -351.155,-203.81 182.245,-203.81 182.245,202.59 -351.155,202.59 -351.155,-203.81 ; 79.248,-201.117 ccw(c80.518,-201.117) 80.518,-202.387 88.9,-202.387 ccw(c88.9,-201.371) 89.916,-201.371 89.916,-197.053 ccw(c88.9,-197.053) 88.9,-196.037 79.248,-196.037 79.248,-201.117 ; 79.248,-193.751 ccw(c80.518,-193.751) 80.518,-195.021 179.578,-195.021 ccw(c179.578,-193.751) 180.848,-193.751 180.848,-188.925 ccw(c179.578,-188.925) 179.578,-187.655 79.248,-187.655 79.248,-193.751 ; 79.248,-185.369 ccw(c80.518,-185.369) 80.518,-186.639 128.27,-186.639 ccw(c128.27,-185.369) 129.54,-185.369 129.54,-181.559 ccw(c128.27,-181.559) 128.27,-180.289 79.248,-180.289 79.248,-185.369 ; 79.248,-178.257 ccw(c80.264,-178.257) 80.264,-179.273 100.838,-179.273 ccw(c100.838,-178.003) 102.108,-178.003 102.108,-174.193 ccw(c100.838,-174.193) 100.838,-172.923 79.248,-172.923 79.248,-178.257 ; 90.932,-201.371 ccw(c91.948,-201.371) 91.948,-202.387 141.732,-202.387 ccw(c141.732,-201.371) 142.748,-201.371 142.748,-197.053 ccw(c141.732,-197.053) 141.732,-196.037 90.932,-196.037 90.932,-201.371 ; 103.124,-178.003 ccw(c104.394,-178.003) 104.394,-179.273 128.27,-179.273 ccw(c128.27,-178.003) 129.54,-178.003 129.54,-174.193 ccw(c128.27,-174.193) 128.27,-172.923 103.124,-172.923 103.124,-178.003 ; 130.556,-185.369 ccw(c131.826,-185.369) 131.826,-186.639 179.578,-186.639 ccw(c179.578,-185.369) 180.848,-185.369 180.848,-181.559 ccw(c179.578,-181.559) 179.578,-180.289 130.556,-180.289 130.556,-185.369 ; 130.556,-178.003 ccw(c131.826,-178.003) 131.826,-179.273 155.702,-179.273 ccw(c155.702,-178.003) 156.972,-178.003 156.972,-174.193 ccw(c155.702,-174.193) 155.702,-172.923 130.556,-172.923 130.556,-178.003 ; 143.764,-201.117 ccw(c145.034,-201.117) 145.034,-202.387 153.416,-202.387 ccw(c153.416,-201.371) 154.432,-201.371 154.432,-197.053 ccw(c153.416,-197.053) 153.416,-196.037 143.764,-196.037 143.764,-201.117 ; 155.448,-201.371 ccw(c156.464,-201.371) 156.464,-202.387 179.578,-202.387 ccw(c179.578,-201.117) 180.848,-201.117 180.848,-197.307 ccw(c179.578,-197.307) 179.578,-196.037 155.448,-196.037 155.448,-201.371 ; 157.988,-178.003 ccw(c159.258,-178.003) 159.258,-179.273 179.578,-179.273 ccw(c179.578,-178.003) 180.848,-178.003 180.848,-174.193 ccw(c179.578,-174.193) 179.578,-172.923 157.988,-172.923 157.988,-178.003
  lines w0.33: -334.62,-89.789 -214.732,-89.789 ; -334.62,-83.627 -214.732,-83.627 ; -336.144,-152.171 ccw(c-334.162,-152.171) -334.162,-154.153 -215.189,-154.153 ccw(c-215.189,-152.171) -213.208,-152.171 -213.208,-70.536 ccw(c-215.189,-70.536) -215.189,-68.555 -334.162,-68.555 ccw(c-334.162,-70.536) -336.144,-70.536 -336.144,-152.171
  lines w0.508: -350.645,-187.404 cw(c-349.377,-189.306) -349.377,-187.02 -337.693,-187.02 cw(c-337.693,-189.306) -335.407,-189.306 -335.407,-190.576 ccw(c-335.153,-190.576) -335.153,-190.83 -268.097,-190.83 cw(c-268.097,-193.116) -265.811,-193.116 -265.811,-201.752 cw(c-268.097,-201.752) -266.195,-203.021 ; 78.135,-203.403 cw(c80.518,-201.117) 77.216,-201.117 77.216,-158.699 cw(c80.518,-158.699) 80.518,-155.397 179.578,-155.397 cw(c179.578,-158.699) 181.83,-156.284 ; -350.647,-201.752 ccw(c-349.377,-201.752) -349.377,-203.022 -268.097,-203.022 ccw(c-268.097,-201.752) -266.827,-201.752 -266.827,-193.116 ccw(c-268.097,-193.116) -268.097,-191.846 -335.153,-191.846 cw(c-335.153,-190.576) -336.423,-190.576 -336.423,-189.306 ccw(c-337.693,-189.306) -337.693,-188.036 -349.377,-188.036 ccw(c-349.377,-189.306) -350.647,-189.306 -350.647,-201.752 ; -159.893,-199.238 ccw(c-156.591,-199.238) -156.591,-202.54 -36.195,-202.54 ccw(c-36.195,-199.238) -32.893,-199.238 -32.893,-158.852 ccw(c-36.195,-158.852) -36.195,-155.55 -156.591,-155.55 ccw(c-156.591,-158.852) -159.893,-158.852 -159.893,-199.238 ; 78.232,-201.117 ccw(c80.518,-201.117) 80.518,-203.403 179.578,-203.403 ccw(c179.578,-201.117) 181.864,-201.117 181.864,-158.699 ccw(c179.578,-158.699) 179.578,-156.413 80.518,-156.413 ccw(c80.518,-158.699) 78.232,-158.699 78.232,-201.117
  lines w0.61: -95.123,-198.476 -91.313,-198.476 ; -95.123,-192.126 -91.313,-192.126 ; -95.123,-185.776 -91.313,-185.776 ; -95.123,-179.426 -91.313,-179.426 ; -95.123,-173.076 -91.313,-173.076
  lines w0.762: -363.855,-216.51 194.945,-216.51 194.945,215.29 -363.855,215.29 -363.855,-216.51
  lines w1.27: 82.931,-169.139 124.841,-169.139 ; 82.931,-159.487 124.841,-159.487 ; 124.841,-169.139 82.677,-169.139 82.677,-159.487 124.841,-159.487 ; 124.841,-169.139 124.841,-159.487
  text "NOTES (UNLESS OTHERWISE SPECIFIED):" at -343.027,189.281 h2.29
  text "GENERAL" at -340.487,184.201 h2.29
  text "1)" at -337.947,179.12 h1.91
  text "PCB IS 6-LAYER, .062\" THICK." at -332.867,179.12 h1.91
  text "2)" at -337.947,175.31 h1.91
  text "CONSTRUCTION IS SOLDER-MASK-OVER-BARE-COPPER (SMOBC)." at -332.867,175.31 h1.91
  text "3)" at -337.947,171.5 h1.91
  text "ACCEPTABILITY SHALL BE BASED ON IPC-A-600, CLASS 2." at -332.867,171.5 h1.91
  text "4)" at -337.947,167.69 h1.91
  text "THE FOLLOWING GERBER RS274X PHOTO TOOL FILES SHALL BE USED TO DEFINE ALL CIRCUIT FEATURES:" at -332.867,167.69 h1.91
  text "*.GTL - TOP LAYER GERBER DATA" at -325.907,162.331 h2.03
  text "*.G1 - MID LAYER 1 GERBER DATA" at -325.907,158.428 h2.03
  text "*.GP1 - INTERNAL PLANE LAYER 1 GERBER DATA" at -325.907,146.719 h2.03
  text "*.GP2 - INTERNAL PLANE LAYER 2 GERBER DATA" at -325.907,142.816 h2.03
  text "*.GP3- INTERNAL PLANE LAYER 3 GERBER DATA" at -325.907,138.913 h2.03
  text "*.GBL - BOTTOM LAYER GERBER DATA" at -325.907,127.203 h2.03
  text "*.GTO - TOP OVERLAY GERBER DATA" at -325.907,123.3 h2.03
  text "*.GTS - TOP SOLDER MASK GERBER DATA" at -325.907,119.397 h2.03
  text "*.GTP - TOP-SIDE SOLDER PASTE MASK" at -325.908,115.494 h2.03
  text "*GBO - BOTTOM OVERLAY GERBER DATA" at -325.907,111.591 h2.03
  text "*.GBS - BOTTOM SOLDER MASK GERBER DATA" at -325.907,107.688 h2.03
  text "*.GBP - BOTTOM-SIDE SOLDER PASTE MASK" at -325.908,103.784 h2.03
  text "5)" at -340.411,85.604 h1.91
  text "THE PHOTO TOOL SHALL NOT BE COMPENSATED WITHOUT PRIOR ENGINEERING APPROVAL." at -335.331,85.604 h1.91
  text "PCB DESIGNER: RICH LOBDILL   PH (805) 880-1621  FAX (805) 961-1792." at -335.331,81.795 h1.91
  text "FABRICATION TOLERANCES" at -339.014,73.508 h2.29
  text "6)" at -336.474,68.426 h1.91
  text "END PRODUCT CONDUCTOR WIDTHS AND PAD DIAMETERS SHALL NOT VARY MORE THAN" at -331.394,68.426 h1.91
  text "0.002\" FROM THE 1:1 DIMENSIONS OF THE MASTER ARTWORK." at -331.394,64.618 h1.91
  text "7)" at -336.474,60.806 h1.91
  text "THE CONDUCTIVE PATTERN SHALL BE POSITIONED SO THAT THE LOCATION OF ANY PAD OR" at -331.394,60.806 h1.91
  text "LAND SHALL BE WITHIN 0.005\" DIAMETER TO THE TRUE POSITION OF THE HOLE IT CIRCUMSCRIBES." at -331.394,56.998 h1.91
  text "8)" at -336.474,53.186 h1.91
  text "ALL DRILL HOLE SIZES AND TOLERANCES APPLY AFTER PLATING." at -331.394,53.186 h1.91
  text "9)" at -336.474,49.376 h1.91
  text "THE MINIMUM ANNULAR RING SHALL BE 0.005\"." at -331.394,49.376 h1.91
  text "10)" at -337.871,45.566 h1.91
  text "BOW AND TWIST SHALL NOT EXCEED 0.010\" PER INCH." at -331.394,45.566 h1.91
  text "11)" at -337.617,41.756 h1.91
  text "FOR PCB ROUTING DIMENSIONS: .XXX = +/-.005\"  .XX = +/-.020\"" at -331.394,41.756 h1.91
  text "MATERIAL" at -339.014,36.678 h2.29
  text "12)" at -337.871,31.596 h1.91
  text "BASE MATERIAL IS FR4 EPOXY FIBERGLASS" at -331.216,31.445 h1.91
  text "SEE STACK-UP LEGEND FOR COPPER CLADDING CALL OUTS" at -331.216,27.889 h1.91
  text "13)" at -337.871,27.786 h1.91
  text "PLATING" at -339.014,22.708 h2.29
  text "14)" at -337.871,17.753 h1.91
  text "ALL HOLES AND CONDUCTIVE SURFACES SHALL BE PLATED WITH A MINIMUM OF 0.001\" COPPER." at -331.394,17.753 h1.91
  text "15)" at -337.871,13.943 h1.91
  text "AFTER SOLDERMASK, ALL EXPOSED HOLES AND CONDUCTIVE SURFACES SHALL BE COATED" at -331.394,13.943 h1.91
  text "WITH A GOLD IMMERSION PLATING TO PRESERVE SOLDERABILITY." at -331.216,10.109 h1.91
  text "COATINGS" at -339.014,5.055 h2.29
  text "16)" at -337.744,0.1 h1.91
  text "THE SOLDERMASK SHALL BE BLACK LIQUID PHOTO-IMAGEABLE PER IPC-SM-840, TYPE-B, CLASS 2." at -331.394,0.1 h1.91
  text "17)" at -337.871,-3.71 h1.91
  text "THE SOLDERMASK REGISTRATION ALLOWANCE IS 0.003\".  THERE SHALL BE NO SOLDERMASK ON" at -331.394,-3.71 h1.91
  text "ANY SOLDER PAD OR LAND." at -331.394,-7.52 h1.91
  text "MARKING" at -339.014,-12.598 h2.29
  text "18)" at -337.871,-17.553 h1.91
  text "THE LEGEND SHALL BE SCREEN-PRINTED USING PERMANENT YELLOW EPOXY INK." at -331.394,-17.553 h1.91
  text "19)" at -337.871,-21.363 h1.91
  text "THE SCREEN PRINTING REGISTRATION ALLOWANCE IS 0.007\".  THERE SHALL BE NO INK ON ANY" at -331.394,-21.363 h1.91
  text "SOLDER PAD OR LAND." at -331.394,-25.171 h1.91
  text "20)" at -338.125,-28.983 h1.91
  text "THE VENDOR CODE AND UL FLAMMABILITY RATING MAY BE ETCHED IN THE FOIL OR MARKED IN" at -331.394,-28.983 h1.91
  text "PERMANENT EPOXY INK (VENDOR'S OPTION)." at -331.394,-32.791 h1.91
  text "ELECTRICAL TESTING" at -339.014,-37.871 h2.29
  text "21)" at -337.871,-42.826 h1.91
  text "ALL BOARDS SHALL BE ELECTRICALLY TESTED TO THE SUPPLIED IPC-D-356A NET LIST" at -331.394,-42.826 h1.91
  text "FOR CONTINUITY, OPENS AND SHORTS." at -331.394,-46.634 h1.91
  text "Layer Stack Up Detail for: 175-00017_rev1, Two Axis Stepper Driver Apps Board.PcbDoc" at -334.62,-77.064 h1.42
  text "Layer" at -334.62,-85.926 h1.42
  text "COPPER THICKNESS" at -283.693,-88.062 h2.54
  text "Name" at -334.62,-88.77 h1.42
  text "Top (*.GTL)" at -334.62,-94.881 h1.98
  text "1/2 oz,  1 oz Finished" at -292.938,-95.199 h2.54
  text "GND1 (*.GP1)" at -334.62,-104.734 h1.98
  text "1 oz" at -292.1,-105.258 h2.54
  text "Mid-Layer 1 (*.G1)" at -334.62,-114.587 h1.98
  text "2 oz" at -291.465,-114.91 h2.54
  text "+48V (*.GP2)" at -334.62,-124.44 h1.98
  text "2 oz" at -292.1,-124.765 h2.54
  text "GND2(*.GP3)" at -334.62,-134.293 h1.98
  text "1 oz" at -293.573,-134.645 h2.54
  text "1/2 oz,  1 oz Finished" at -292.506,-143.434 h2.54
  text "Bottom Layer (*.GBL)" at -334.62,-144.146 h1.98
  text "Las Cumbres Observatory, Inc." at 129.159,-159.995 h2.29
  text "Las Cumbres Observatory" at 84.201,-163.043 h3.81
  text "PRIMARY PCB SPECIFICATIONS" at -148.539,-163.424 h5.08
  text "6740 Cortona Dr." at 140.335,-163.906 h2.29
  text "Global Telescope Network" at 88.265,-167.107 h3.17
  text "Goleta, CA 93117" at 139.065,-167.716 h2.29
  text "(REFER TO COMPLETE SPEC LISTING AT LEFT FOR FURTHER DETAILS)" at -157.353,-168.631 h2.54
  text "www.lcogt.net" at 142.621,-171.425 h2.29
  text "DATE" at 79.756,-174.239 h0.81
  text "DESIGNED" at 103.632,-174.239 h0.81
  text "DRAWN" at 131.064,-174.239 h0.81
  text "SCALE" at 158.496,-174.239 h0.81
  text "NUMBER OF LAYERS" at -154.813,-174.981 h3.81
  text "6" at -64.643,-174.981 h3.81
  text "Rich Lobdill" at 138.811,-176.759 h1.4
  text "Rich Lobdill" at 110.236,-176.886 h1.4
  text "1 : 1" at 165.735,-177.241 h2.29
  text "10/29/2010" at 80.518,-177.419 h2.29
  text "FINISHED THICKNESS" at -154.813,-181.331 h3.81
  text ".062\"" at -69.088,-181.331 h3.81
  text "CHECKED/DATE" at 79.756,-181.605 h0.81
  text "APPROVED/DATE" at 131.064,-181.605 h0.81
  text "BASE MATERIAL" at -154.813,-187.681 h3.81
  text "FR4" at -70.993,-187.681 h3.81
  text "TITLE" at 79.756,-188.971 h0.81
  text "NOTICE" at -349.25,-191.719 h2.54
  text "175-00017, Two Axis Stepper Motor Driver" at 85.344,-192.634 h2.54
  text "GOLD IMMERSION" at -83.541,-193.192 h3.81
  text "PLATING TYPE" at -154.813,-194.031 h3.81
  text "THIS DRAWING EMBODIES A PROPRIETARY DESIGN OWNED BY LAS CUMBRES" at -348.361,-194.64 h1.52
  text "OBSERVATORY.  IT IS SUBMITTED FOR A SPECIFIC PURPOSE UNDER A CON-" at -348.361,-197.18 h1.52
  text "SIZE" at 79.756,-197.353 h0.81
  text "DOC NO." at 91.44,-197.353 h0.81
  text "REV" at 144.272,-197.353 h0.81
  text "SHEET" at 155.956,-197.353 h0.81
  text "FIDENTIAL RELATIONSHIP, AND EXCEPT FOR PURPOSES EXPRESSLY GRANTED" at -348.361,-199.593 h1.52
  text "OF" at 166.878,-199.974 h1.52
  text "SOLDER MASK COLOR" at -154.813,-200.381 h3.81
  text "BLACK" at -67.818,-200.381 h3.81
  text "1" at 162.56,-200.482 h2.54
  text "X" at 172.72,-200.482 h2.54
  text "1" at 147.955,-200.812 h3.3
  text "-" at 105.537,-200.863 h3.3
  text "GPT" at 123.818,-201.239 h3.3
  text "C" at 83.185,-201.27 h2.54
  text "IN WRITING, ALL RIGHTS ARE RESERVED BY LAS CUMBRES OBSERVATORY." at -348.361,-201.879 h1.52
Mechanical 5:
  text "175-00017 rev 1, Two Axis Stepper Motor Driver" at -8.127,-26.884 h2.03
  text "LAS CUMBRES OBSERVATORY     11/29/2010" at -8.127,-30.694 h2.03
Drill Drawing:
  lines w0.254: -351.155,-203.81 182.245,-203.81 182.245,202.59 -351.155,202.59 -351.155,-203.81 ; 79.248,-201.117 ccw(c80.518,-201.117) 80.518,-202.387 88.9,-202.387 ccw(c88.9,-201.371) 89.916,-201.371 89.916,-197.053 ccw(c88.9,-197.053) 88.9,-196.037 79.248,-196.037 79.248,-201.117 ; 79.248,-193.751 ccw(c80.518,-193.751) 80.518,-195.021 179.578,-195.021 ccw(c179.578,-193.751) 180.848,-193.751 180.848,-188.925 ccw(c179.578,-188.925) 179.578,-187.655 79.248,-187.655 79.248,-193.751 ; 79.248,-185.623 ccw(c80.264,-185.623) 80.264,-186.639 116.332,-186.639 ccw(c116.332,-185.369) 117.602,-185.369 117.602,-181.559 ccw(c116.332,-181.559) 116.332,-180.289 79.248,-180.289 79.248,-185.623 ; 90.932,-201.371 ccw(c91.948,-201.371) 91.948,-202.387 141.732,-202.387 ccw(c141.732,-201.371) 142.748,-201.371 142.748,-197.053 ccw(c141.732,-197.053) 141.732,-196.037 90.932,-196.037 90.932,-201.371 ; 118.618,-185.369 ccw(c119.888,-185.369) 119.888,-186.639 155.702,-186.639 ccw(c155.702,-185.369) 156.972,-185.369 156.972,-181.559 ccw(c155.702,-181.559) 155.702,-180.289 118.618,-180.289 118.618,-185.369 ; 143.764,-201.117 ccw(c145.034,-201.117) 145.034,-202.387 153.416,-202.387 ccw(c153.416,-201.371) 154.432,-201.371 154.432,-197.053 ccw(c153.416,-197.053) 153.416,-196.037 143.764,-196.037 143.764,-201.117 ; 155.448,-201.371 ccw(c156.464,-201.371) 156.464,-202.387 179.578,-202.387 ccw(c179.578,-201.117) 180.848,-201.117 180.848,-197.307 ccw(c179.578,-197.307) 179.578,-196.037 155.448,-196.037 155.448,-201.371 ; 157.988,-185.369 ccw(c159.258,-185.369) 159.258,-186.639 179.578,-186.639 ccw(c179.578,-185.369) 180.848,-185.369 180.848,-181.559 ccw(c179.578,-181.559) 179.578,-180.289 157.988,-180.289 157.988,-185.369
  lines w0.508: -350.518,-187.785 cw(c-349.25,-189.687) -349.25,-187.401 -337.566,-187.401 cw(c-337.566,-189.687) -335.28,-189.687 -335.28,-190.957 ccw(c-335.026,-190.957) -335.026,-191.211 -267.97,-191.211 cw(c-267.97,-193.497) -265.684,-193.497 -265.684,-202.133 cw(c-267.97,-202.133) -266.068,-203.402 ; 78.103,-203.369 cw(c80.518,-201.117) 77.216,-201.117 77.216,-180.289 cw(c79.248,-180.289) 79.248,-178.257 179.578,-178.257 cw(c179.578,-181.559) 181.83,-179.144 ; -350.52,-202.133 ccw(c-349.25,-202.133) -349.25,-203.403 -267.97,-203.403 ccw(c-267.97,-202.133) -266.7,-202.133 -266.7,-193.497 ccw(c-267.97,-193.497) -267.97,-192.227 -335.026,-192.227 cw(c-335.026,-190.957) -336.296,-190.957 -336.296,-189.687 ccw(c-337.566,-189.687) -337.566,-188.417 -349.25,-188.417 ccw(c-349.25,-189.687) -350.52,-189.687 -350.52,-202.133 ; 78.232,-201.117 ccw(c80.518,-201.117) 80.518,-203.403 179.578,-203.403 ccw(c179.578,-201.117) 181.864,-201.117 181.864,-181.559 ccw(c179.578,-181.559) 179.578,-179.273 79.248,-179.273 ccw(c79.248,-180.289) 78.232,-180.289 78.232,-201.117
  lines w0.762: -363.855,-216.51 194.945,-216.51 194.945,215.29 -363.855,215.29 -363.855,-216.51
  text ".Legend" at -85.115,-99.238 h2.54
  text "DESIGNED" at 79.756,-181.605 h0.81
  text "DRAWN" at 119.126,-181.605 h0.81
  text "SCALE" at 158.496,-181.605 h0.81
  text "Rich Lobdill" at 92.1,-184.048 h1.4
  text "Rich Lobdill" at 131.75,-184.099 h1.4
  text "1 : 1" at 165.735,-184.607 h2.29
  text "TITLE" at 79.756,-188.971 h0.81
  text "NOTICE" at -349.123,-192.1 h2.54
  text "175-00017, Two Axis Stepper Motor Driver" at 85.268,-192.634 h2.54
  text "THIS DRAWING EMBODIES A PROPRIETARY DESIGN OWNED BY LAS CUMBRES" at -348.234,-195.021 h1.52
  text "SIZE" at 79.756,-197.353 h0.81
  text "DOC NO." at 91.44,-197.353 h0.81
  text "REV" at 144.272,-197.353 h0.81
  text "SHEET" at 155.956,-197.353 h0.81
  text "OBSERVATORY.  IT IS SUBMITTED FOR A SPECIFIC PURPOSE UNDER A CON-" at -348.234,-197.561 h1.52
  text "FIDENTIAL RELATIONSHIP, AND EXCEPT FOR PURPOSES EXPRESSLY GRANTED" at -348.234,-199.974 h1.52
  text "OF" at 166.878,-199.974 h1.52
  text "2" at 162.179,-200.482 h2.54
  text "X" at 172.72,-200.482 h2.54
  text "-" at 105.537,-200.863 h3.3
  text "1" at 147.828,-200.863 h3.3
  text "C" at 83.185,-201.27 h3.05
  text "GD1" at 126.365,-201.27 h3.05
  text "IN WRITING, ALL RIGHTS ARE RESERVED BY LAS CUMBRES OBSERVATORY." at -348.234,-202.26 h1.52

## Dimensions
0,0 to 35,0 on Mechanical 2
0,0 to 0,80 on Mechanical 2

## Text inside footprints (layer, text, board x,y; h text height)
P3: Bottom Overlay "103" at 37.175,23.441 h0.76 r90; Bottom Overlay "104" at 27.475,18.925 h0.76; Bottom Overlay "1" at 34.475,60.1 h0.76 r90